# EAGLE board untitled (EAGLE 6.2)
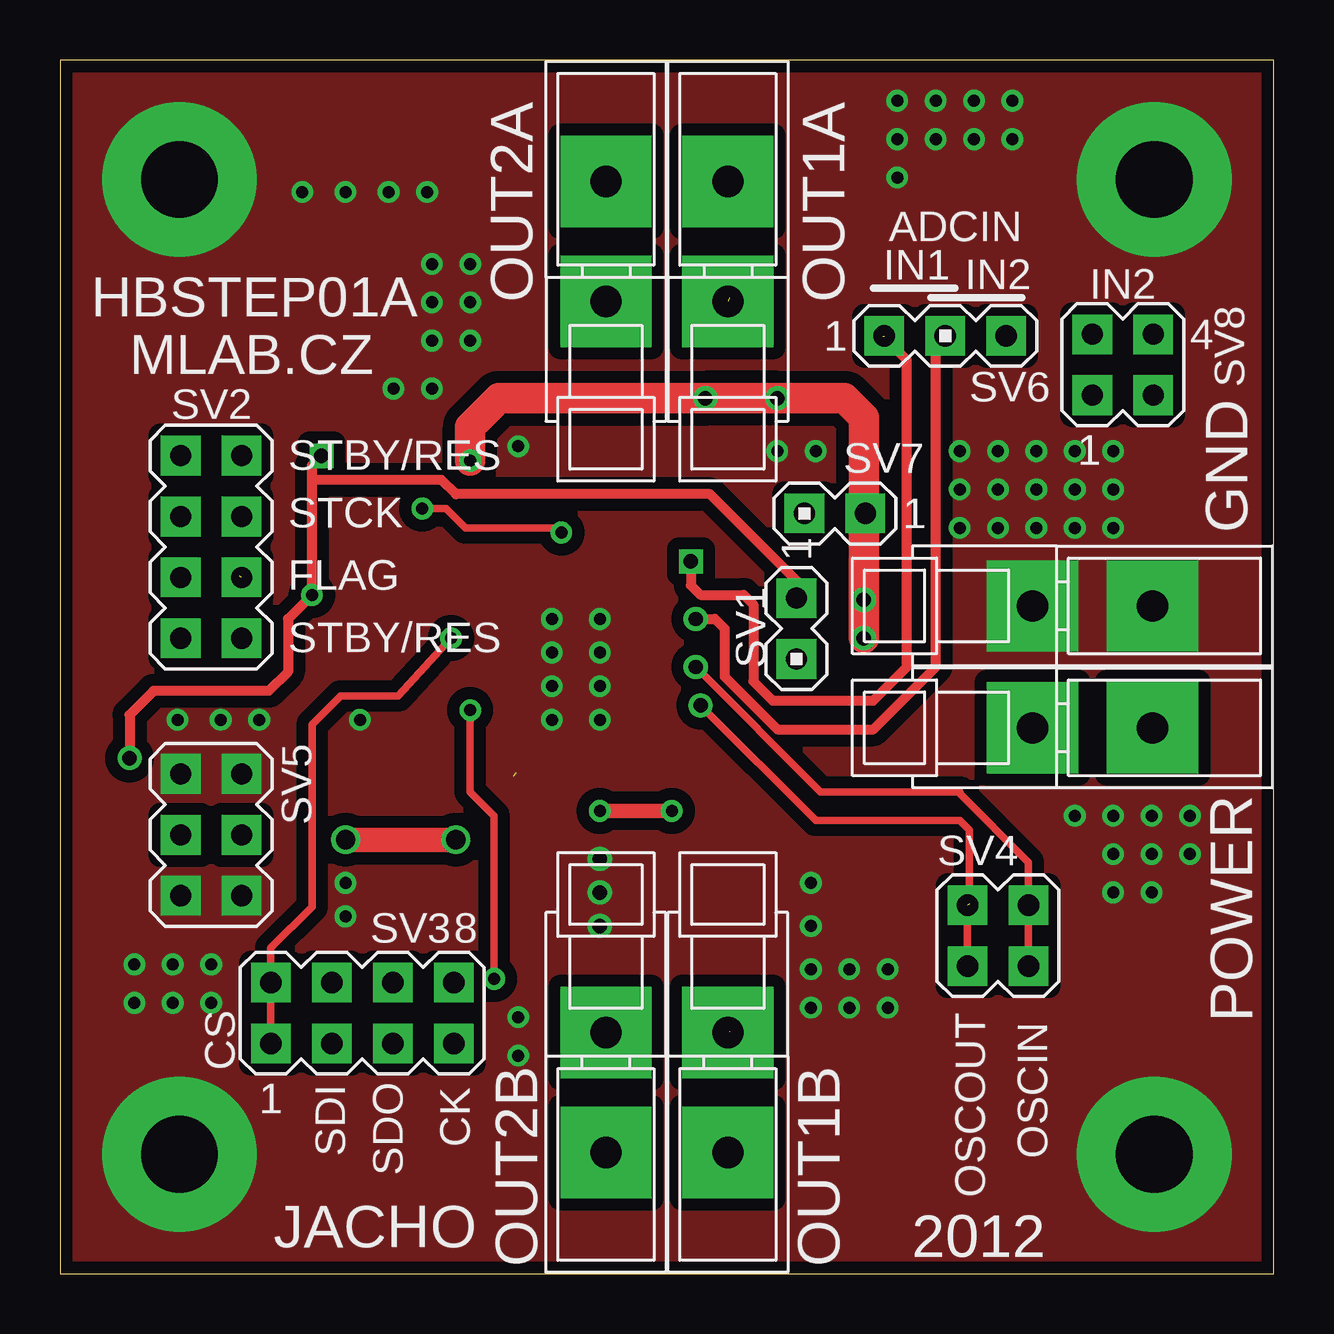
[diagram p0: board, top side]
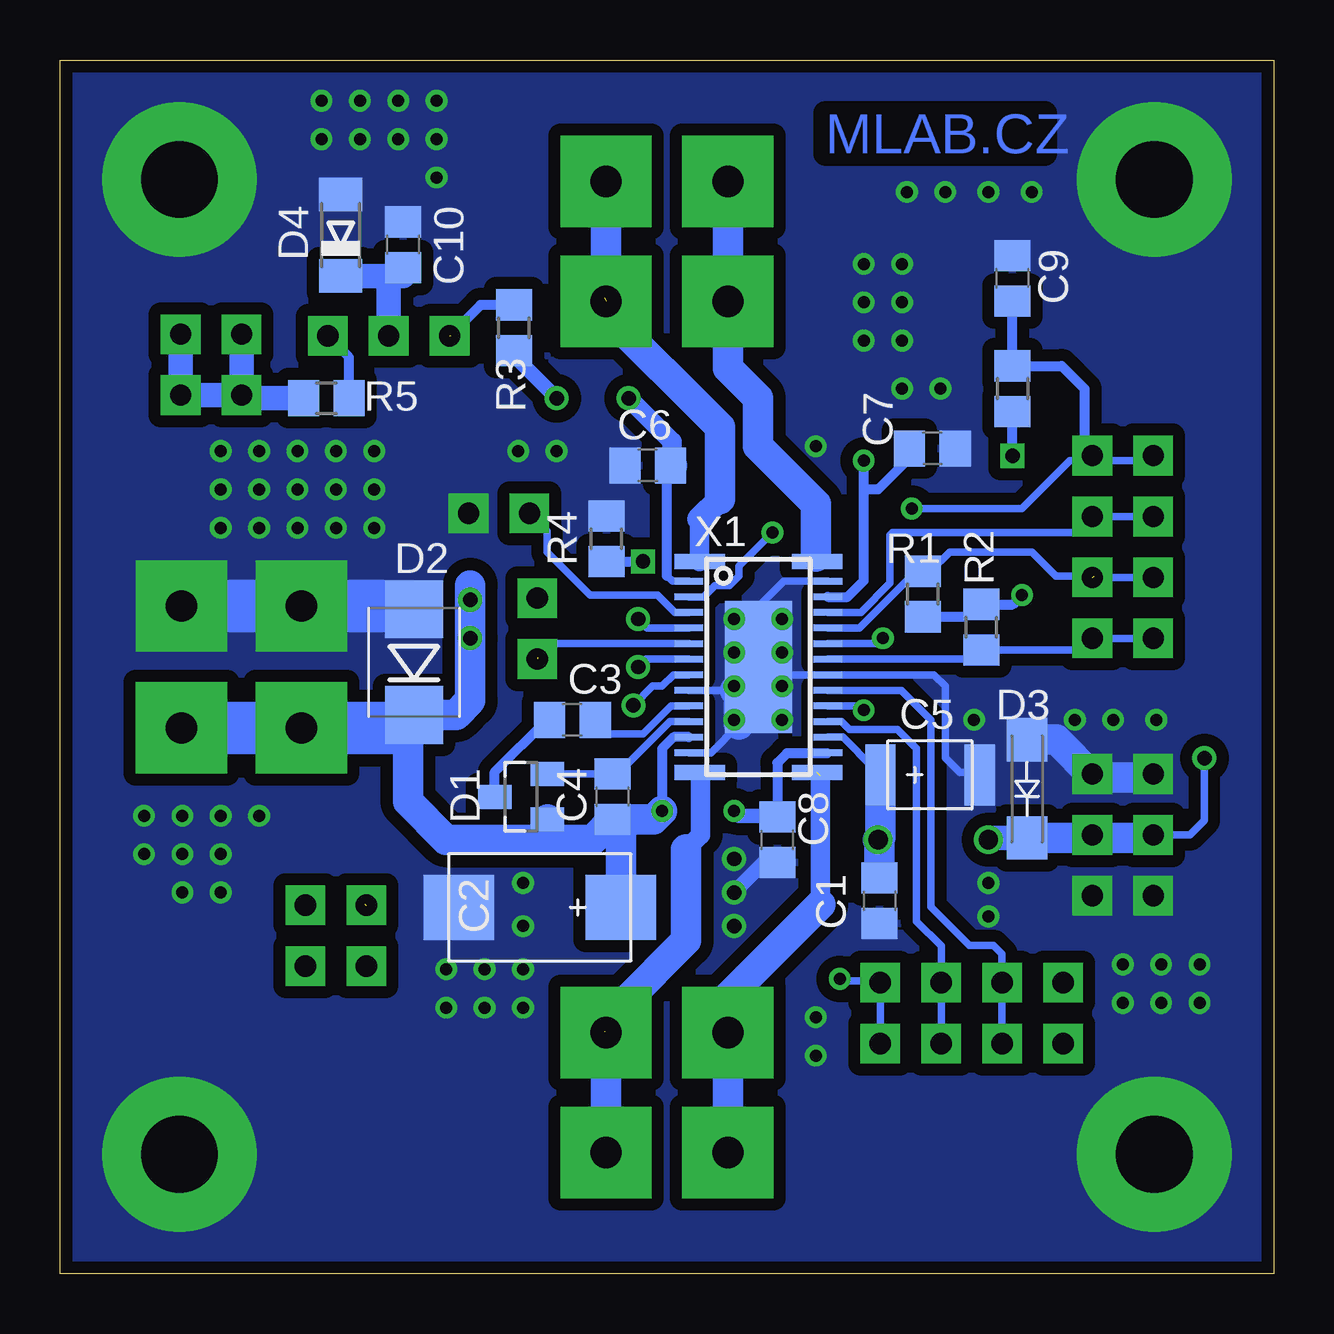
[diagram p1: board, bottom side, seen from below]

Size 50.6 x 50.6 mm. Coordinates in mm from the lower left corner, seen from the top.
Outline: 0,0 50.6,0 50.6,50.6 0,50.6 0,0
Copper layers (1*16): Top 0.035mm / dielectric 1mm / Bottom 0.035mm
Design rules: minimum track width 12mil, minimum drill 24mil, track to track 20mil, track to pad 20mil, pad to pad 20mil, via to via 20mil, smd to smd 8mil, copper to edge 20mil, drill to drill 70mil, minimum pad ring 10mil, minimum via ring 8mil, stop-mask expansion 5mil, vias tented up to drill 0mil, thermal gap 0mil

## Footprints (pad centres in the part's own frame; a part is rotated, then mirrored left to right if it is on the bottom)
C0805 = smd 1.3 x 1.5: 1 -0.95,0; 2 0.95,0
D = smd 2.95 x 2.7: + 3.375,0; - -3.375,0
B = smd 1.27 x 2.54: + 2.223,0; - -1.905,0
WAGO256 = drill 1.3 pad 3.81 square: 1 0,0; A1 -5,0
SOT23 = smd 1 x 1.4: 1 -0.95,-1.1; 2 0.95,-1.1; 3 0,1.1
SMB = smd 2.4 x 2.4: A 2.2,0; K -2.2,0
SMA = smd 1.8 x 1.7: A -2.05,0; K 2.05,0
MINIMELF = smd 1.4 x 1.8: A 1.7,0; C -1.7,0
R0805 = smd 1.3 x 1.5: 1 -0.95,0; 2 0.95,0
MA02-1 = drill 0.889 pad 1.651 square: 1 -1.27,0; 2 1.27,0
MA04-2 = drill 0.889 pad 1.651 square: 1 -3.81,-1.27; 2 -3.81,1.27; 3 -1.27,-1.27; 4 -1.27,1.27; 5 1.27,-1.27; 6 1.27,1.27; 7 3.81,-1.27; 8 3.81,1.27
MA04-2@1 = drill 0.889 pad 1.651 square: 1 -3.81,-1.27; 2 -3.81,1.27; 3 -1.27,-1.27; 4 -1.27,1.27; 5 1.27,-1.27; 6 1.27,1.27; 7 3.81,-1.27; 8 3.81,1.27
MA02-2 = drill 0.889 pad 1.651 square: 1 -1.27,-1.27; 2 -1.27,1.27; 3 1.27,-1.27; 4 1.27,1.27
MA03-2 = drill 0.889 pad 1.651 square: 1 -2.54,-1.27; 2 -2.54,1.27; 3 0,-1.27; 4 0,1.27; 5 2.54,-1.27; 6 2.54,1.27
MA03-1 = drill 0.889 pad 1.651 square: 1 -2.54,0; 2 0,0; 3 2.54,0
MA02-2@1 = drill 0.889 pad 1.651 square: 1 -1.27,-1.27; 2 -1.27,1.27; 3 1.27,-1.27; 4 1.27,1.27
HTSSOP28 = smd 0.61 x 2.1: 1 -4.395,-2.45; 14 4.395,-2.45; 15 4.395,2.45; 28 -4.395,2.45 | smd 0.27 x 1.2: 2 -3.575,-2.9; 3 -2.925,-2.9; 4 -2.275,-2.9; 5 -1.625,-2.9; 6 -0.975,-2.9; 7 -0.325,-2.9; 8 0.325,-2.9; 9 0.975,-2.9; 10 1.625,-2.9; 11 2.275,-2.9; 12 2.925,-2.9; 13 3.575,-2.9; 16 3.575,2.9; 17 2.925,2.9; 18 2.275,2.9; 19 1.625,2.9; 20 0.975,2.9; 21 0.325,2.9; 22 -0.325,2.9; 23 -0.975,2.9; 24 -1.625,2.9; 25 -2.275,2.9; 26 -2.925,2.9; 27 -3.575,2.9 | smd 5.5 x 2.8: P$1 0,0
SROUB3M = drill 3.2 pad 6.452: P$1 0,0

## Placement (x,y rotation side)
C1  [C0805]  16.44,15.56 270 bottom
C2  22M/20V  [D]  30.6,15.28 0 bottom
C3  [C0805]  29.24,23.1 180 bottom
C4  [C0805]  27.57,19.89 90 bottom
C5  1M/35V  [B]  14.18,20.8 180 bottom
C6  [C0805]  26.1,33.7 180 bottom
C7  [C0805]  14.24,34.41 0 bottom
C8  [C0805]  20.7,18.1 270 bottom
C9  100p  [C0805]  10.9,41.5 90 bottom
C10  [C0805]  36.3,42.9 90 bottom
CON1  WAGO256  [WAGO256]  27.84,10.06 90 top
CON2  WAGO256  [WAGO256]  22.76,10.06 90 top
CON3  WAGO256  [WAGO256]  27.84,40.54 270 top
CON4  WAGO256  [WAGO256]  22.76,40.54 270 top
CON5  WAGO256  [WAGO256]  40.54,27.84 180 top
CON6  WAGO256  [WAGO256]  40.54,22.76 180 top
D1  [SOT23]  31.38,19.89 90 bottom
D2  [SMB]  35.84,25.5 90 bottom
D3  [SMA]  10.29,20.22 270 bottom
D4  [MINIMELF]  38.9,43.3 90 bottom
R1  [R0805]  14.64,28.34 270 bottom
R2  [R0805]  12.2,26.96 90 bottom
R3  [R0805]  31.68,39.44 270 bottom
R4  [R0805]  27.82,30.64 270 bottom
R5  [R0805]  39.5,36.5 0 bottom
R5-PULLUP  [R0805]  10.9,36.9 270 bottom
SV1  [MA02-1]  30.7,26.9 270 top
SV2  [MA04-2]  6.3,30.3 270 top
SV3  [MA04-2@1]  12.6,10.87 0 top
SV4  [MA02-2]  39.1,14.1 0 top
SV5  [MA03-2]  6.3,18.3 270 top
SV6  [MA03-1]  36.9,39.1 0 top
SV7  [MA02-1]  32.3,31.7 180 top
SV8  [MA02-2@1]  44.3,37.9 0 top
X1  [HTSSOP28]  21.49,25.3 270 bottom
X3  [SROUB3M]  4.98,45.62 0 top
X4  [SROUB3M]  4.98,4.98 0 top
X5  [SROUB3M]  45.62,45.62 90 top
X6  [SROUB3M]  45.62,4.98 0 top

## Library data of the parts
C1 C3 C4 C6-C10 R1-R5 R5-PULLUP = rcl
C2 C5 = PaJa_C-tantal_SMD
CON1-CON6 = PaJa_22
D1 D4 = moje_diody
D2 D3 X3-X6 = moje
SV1 SV4 SV7 SV8 = moje_hrebinky
SV2 SV3 SV5 SV6 = moje_hrebinky; OC_FARNELL: unknown; OC_NEWARK: unknown
X1 = moje_io

## Nets
+12V: C2.+ C4.1 C6.1 C7.1 C8.1 CON6.1 CON6.A1 D1.1 D2.K R3.2 X1.2 X1.12 X1.16 X1.26
ADCIN: C10.1 D4.C SV6.2 X1.5
GND: C1.2 C2.- C5.- C6.2 C7.2 C8.2 C9.2 C10.2 CON5.1 CON5.A1 D2.A D3.A D4.A R4.1 SV5.1 SV5.2 SV5.5 SV5.6 SV7.1 X1.9 X1.13 X1.21 X1.27 X1.P$1 X3.P$1 X4.P$1 X5.P$1 X6.P$1
N$1: R1.1 SV2.5 SV2.6 X1.24
N$2: R2.1 SV2.7 SV2.8 X1.22
N$3: SV2.3 SV2.4 X1.25
N$4: C9.1 R5-PULLUP.1 SV2.1 SV2.2 X1.3
N$5: SV3.1 SV3.2 X1.23
N$6: SV3.3 SV3.4 X1.20
N$7: SV3.5 SV3.6 X1.18
N$8: SV1.2 X1.6
N$9: SV7.2 X1.4
N$10: SV4.3 SV4.4 X1.7
N$11: CON4.1 CON4.A1 X1.28
N$12: CON3.1 CON3.A1 X1.1
N$13: CON1.1 CON1.A1 X1.14
N$14: CON2.1 CON2.A1 X1.15
N$15: SV4.1 SV4.2 X1.8
N$16: SV3.7 SV3.8 X1.19
N$17: R3.1 R4.2 SV6.1
N$18: R5.2 SV6.3
N$19: C4.2 D1.2 X1.11
N$20: C3.2 D1.3
N$21: C3.1 X1.10
N$22: R5.1 SV8.1 SV8.2 SV8.3 SV8.4
VCC: C1.1 C5.+ D3.K R1.2 R2.2 R5-PULLUP.2 SV1.1 SV5.3 SV5.4 X1.17

## Tracks (layer width: path | path; a pad name or v marks a point on that pad's centre or on a via)
+12V  (via drill 0.5, 0.6)
  Top 0.61: v25.5,19.3 v22.5,19.3
  Top 1.27: v17.1,33.9 17.1,35.3 18.3,36.5 v26.9,36.5 v29.9,36.5 32.7,36.5 33.5,35.7 v33.5,28.1 v33.5,26.5
  Bottom 0.305: C7.1 15.19,34.01 | 18.61,21.7 X1.16 | X1.2 25.07,28.88 25.3,29.1
  Bottom 0.406: X1.26 17.77,28.22 17.1,28.9 17.1,32.7 | 15.19,34.01 16.5,32.7 17.1,32.7 | 17.1,32.7 v17.1,33.9 | 18.61,21.7 20.3,21.7 20.7,21.3 20.7,19.1 | X1.12 25.02,22.38 25.5,21.9 v25.5,19.3 | 25.3,29.1 25.3,33.5 25.1,33.7
  Bottom 0.61: v22.5,19.3 22.3,19.1 20.7,19.1 C8.1 | R3.2 31.68,38.28 v29.9,36.5
  Bottom 0.813: 25.1,33.7 25.1,34.7 v26.9,36.5
  Bottom 1.27: 30.3,18.1 34.5,18.1 36.1,19.7 36.1,22.9 35.9,23.1 35.9,23.24 D2.K 34.1,23.3 33.5,23.9 v33.5,26.5 33.5,28.7 | 30.3,18.1 28.41,18.1 C4.1 | D1.1 30.28,18.92 30.3,18.9 30.3,18.1 | C4.1 25.86,18.94 v25.5,19.3 | C2.+ 27.22,18.59 C4.1 | 25.1,33.7 C6.1
  Bottom 2.184: CON6.A1 CON6.1 36.38,22.76 D2.K
ADCIN  (via drill 0.6)
  Top 0.406: v26.5,27.3 27.3,27.3 27.7,26.9 27.7,24.9 29.9,22.7 33.9,22.7 36.5,25.3 36.5,38.7 SV6.2
  Bottom 0.305: X1.5 26.12,26.92 v26.5,27.3
  Bottom 1.016: D4.C 36.9,41.6 | 36.9,41.6 SV6.2 | 36.9,41.6 36.3,41.6 C10.1
GND  (via drill 0.5, 0.6)
  Bottom 0.305: X1.27 20.42,28.88 21.4,27.9 21.4,25.39 X1.P$1 21.16,24.97 X1.21 14.18,24.97 13.7,24.5 13.7,21.5 13.1,20.9 12.9,20.9 | X1.9 22.47,24.32 22.3,24.5 | X1.13 23.47,21.72 22.3,22.9
  Bottom 0.61: C8.2 21.25,17.15 v22.5,15.9
  Bottom 1.27: D3.A 9.07,22.27 7.5,20.7 4.9,20.7 | 22.3,22.9 22.3,24.15 22.47,24.32 | 22.3,24.5 22.29,24.5 X1.P$1
  Bottom 2.184: CON5.A1 CON5.1 35.98,27.84 D2.A
  other vias: 20.5,27.3 45.5,17.5 47.1,17.5 6.3,12.9 6.3,11.3 4.7,12.9 4.7,11.3 11.9,45.1 15.3,45.1 40.7,32.7 42.3,32.7 43.9,32.7 40.7,31.1 42.3,31.1 43.9,31.1 10.1,45.1 13.7,45.1 45.5,19.1 47.1,19.1 4.9,23.1 6.7,23.1 8.3,23.1 22.5,27.3 22.5,25.9 20.5,25.9 20.5,23.1 22.5,23.1 22.5,24.5 20.5,24.5 31.3,16.3 31.3,14.5 31.3,12.7 32.9,12.7 34.5,12.7 31.3,11.1 32.9,11.1 34.5,11.1 42.3,19.1 43.9,19.1 43.9,17.5 43.9,15.9 45.5,15.9 43.9,34.3 42.3,34.3 40.7,34.3 39.1,31.1 39.1,32.7 39.1,34.3 37.5,34.3 37.5,32.7 37.5,31.1 34.9,48.9 36.5,48.9 38.1,48.9 34.9,47.3 36.5,47.3 38.1,47.3 34.9,45.7 39.7,47.3 39.7,48.9 13.9,36.9 17.1,40.5 19.1,34.5 15.5,36.9 12.5,23.1 11.9,16.3 11.9,14.9 3.1,12.9 3.1,11.3 15.5,38.9 17.1,42.1 15.5,40.5 15.5,42.1 17.1,38.9 19.1,10.7 19.1,9.1 31.5,34.3 29.9,34.3 22.5,17.3 22.5,14.5
  pour Bottom: -1.3,50.9 50.9,50.9 50.9,-1.3 -1.3,-1.3
  pour Top: -1.5,51.1 50.9,50.9 50.9,-0.1 -1.5,0.1
N$1  (1 unrouted)
  Bottom 0.305: X1.24 17.27,26.92 14.9,29.3 R1.1 | 14.5,29.3 R1.1 | R1.1 14.31,29.29 13.5,30.1 10.1,30.1 9.1,29.1 7.49,29.1 | SV2.5 SV2.6
N$2
  Bottom 0.305: X1.22 12.59,25.62 R2.1 8.04,26.01 SV2.8 SV2.7
N$3
  Bottom 0.305: X1.25 17.22,27.57 16,28.8 16,30.8 15.9,30.9 8.23,30.9 SV2.4 SV2.3
N$4  (via drill 0.5)
  Top 0.305: v15.1,31.9 16.1,31.9 16.9,31.1 20.7,31.1 v20.9,30.9
  Bottom 0.305: X1.3 23.77,28.22 23.3,28.7 22.7,28.7 22.3,29.1 22.3,29.5 v20.9,30.9 | v15.1,31.9 10.5,31.9 8.5,33.9 8.1,33.9 5.24,33.9 SV2.1
  Bottom 0.406: 7.9,34.1 7.9,36.9 8.85,37.85 R5-PULLUP.1 C9.1 | 7.9,34.1 8.1,33.9 | 7.9,34.1 SV2.2
N$5  (via drill 0.5)
  Top 0.305: v16.3,26.5 14.1,24.1 11.7,24.1 10.5,22.9 10.5,15.3 8.79,13.59 SV3.2 SV3.1
  Bottom 0.305: X1.23 16.32,26.27 v16.3,26.5
N$6
  Bottom 0.305: X1.20 15.53,24.32 14.3,23.1 14.3,15.3 12.7,13.7 11.7,13.7 11.33,13.33 SV3.4 SV3.3
N$7
  Bottom 0.305: X1.18 18.02,23.02 17.7,22.7 15.7,22.7 14.9,21.9 14.9,14.7 13.87,13.67 SV3.6 SV3.5
N$8  (1 unrouted)
  Bottom 0.305: X1.6 30.12,26.27 30.7,25.7
N$9
  Bottom 0.305: X1.4 24.97,27.57 25.7,28.3 28.5,28.3 30.3,30.1 30.3,30.97 SV7.2
N$10  (via drill 0.6)
  Top 0.305: v26.5,25.3 31.7,20.1 37.5,20.1 37.5,20.02 40.37,17.15 SV4.4 SV4.3
  Bottom 0.305: X1.7 26.17,25.62 v26.5,25.3
N$11
  Bottom 0.406: X1.28 19.04,29.84 19.1,29.9
  Bottom 1.27: CON4.A1 CON4.1 22.76,37.76 21.5,36.5 21.5,34.5 19.1,32.1 19.1,29.9
N$12  (1 unrouted)
  Bottom 0.813: X1.1 23.94,31.46
  Bottom 1.016: 23.94,31.46 23.1,32.3
  Bottom 1.27: CON3.1 CON3.A1 | 27.9,40.7 27.9,40.1 23.1,35.3 23.1,32.3
N$13  (1 unrouted)
  Bottom 0.305: 23.9,20.7 23.9,20.86 X1.14
  Bottom 0.813: 27.9,10.12 CON1.1 | 24.5,17.7 23.9,18.3 23.9,20.7
  Bottom 1.27: CON1.A1 CON1.1 | 24.5,17.7 24.5,13.9 27.1,11.3 27.1,10.9 27.9,10.1
N$14  (1 unrouted)
  Bottom 0.813: 18.9,15.4 18.9,20.76
  Bottom 1.27: CON2.A1 CON2.1 22.76,11.54 18.9,15.4
N$15  (via drill 0.6)  (1 unrouted)
  Top 0.305: v26.7,23.7 31.5,18.9 37.5,18.9 37.9,18.5 37.9,15.43 | SV4.2 SV4.1
  Bottom 0.305: X1.8 25.02,24.97 25.5,24.5 25.9,24.5 v26.7,23.7
N$16  (via drill 0.5)
  Top 0.305: v17.1,23.5 17.1,20.1 18.1,19.1 v18.1,12.3
  Bottom 0.305: X1.19 17.27,23.67 v17.1,23.5 | SV3.7 SV3.8 16.41,12.21 18.01,12.21 v18.1,12.3
N$17  (via drill 0.6)  (1 unrouted)
  Top 0.406: v26.3,29.7 26.3,28.7 26.7,28.3 28.5,28.3 28.9,27.9 28.9,24.7 29.7,23.9 33.9,23.9 35.3,25.3 35.3,38.1 34.3,39.1
  Bottom 0.406: R4.2 v26.31,29.69 v26.3,29.7 | R3.1 33.07,40.39 SV6.1
N$18
  Bottom 0.406: R5.2 38.55,38.21 SV6.3
N$19
  Bottom 0.305: D1.2 C4.2 27.5,20.77 27.5,20.7 25.17,23.02 X1.11
N$20
  Bottom 0.305: 30.3,23.1 C3.2
  Bottom 0.406: C3.2 29.9,23.1 | D1.3 32.48,20.92 30.3,23.1
N$21
  Bottom 0.305: X1.10 25.12,23.67 26.3,22.5 27.7,22.5 C3.1
N$22
  Bottom 1.016: R5.1 42.9,36.5 SV8.1 | SV8.1 SV8.3 SV8.4 | SV8.2 SV8.1
VCC  (via drill 0.5, 0.6, 0.8)
  Top 0.406: v2.9,21.5 2.9,23.3 3.9,24.3 8.7,24.3 9.5,25.1 9.5,27.3 v10.5,28.3 10.5,33.1 | 10.5,33.1 10.5,33.7 v10.9,34.1 | SV1.1 30.7,28.9 27.1,32.5 16.5,32.5 15.9,33.1 10.5,33.1
  Top 1.016: v11.9,18.1 v16.5,18.1
  Bottom 0.305: 12.91,27.39 12.39,27.91 R2.2 | v2.9,21.5 2.9,18.9 3.5,18.3 SV5.3 5.1,18.3 | X1.17 17.97,22.38 16.7,21.1 C5.+
  Bottom 0.406: v10.9,34.1 R5-PULLUP.2 | 12.91,27.39 R1.2 | R2.2 10.89,27.91 v10.5,28.3 | SV5.4 7.53,18.3 7.53,18.17
  Bottom 1.016: D3.K 11.83,18.17 v11.9,18.1
  Bottom 1.27: D3.K 7.53,18.17 5.03,18.17 SV5.3 | C5.+ 16.4,18.2 v16.5,18.1 16.44,18.04 C1.1

## Text on the board
Bottom: MLAB.CZ
tPlace: ADCIN | IN1 | IN2 | IN2 | OUT2A | OUT1A | HBSTEP01A | MLAB.CZ | STBY/RES | STCK | GND | FLAG | STBY/RES | OSCOUT | OSCIN | POWER | CS | SDI | CK | SDO | JACHO | 2012 | OUT2B | OUT1B